# Altium PCB AX301_AX4010.PcbDoc (part 2 of 10)
Units mil, origin at the board's own origin, x right, y up, seen from the top; angles counter-clockwise.
Board outline 5185 x 3614 mil, 4 copper layers (Top Layer, GND, Mid-Layer 1, Bottom Layer); 191 components, 338 nets, 1108 pads, 420 vias.
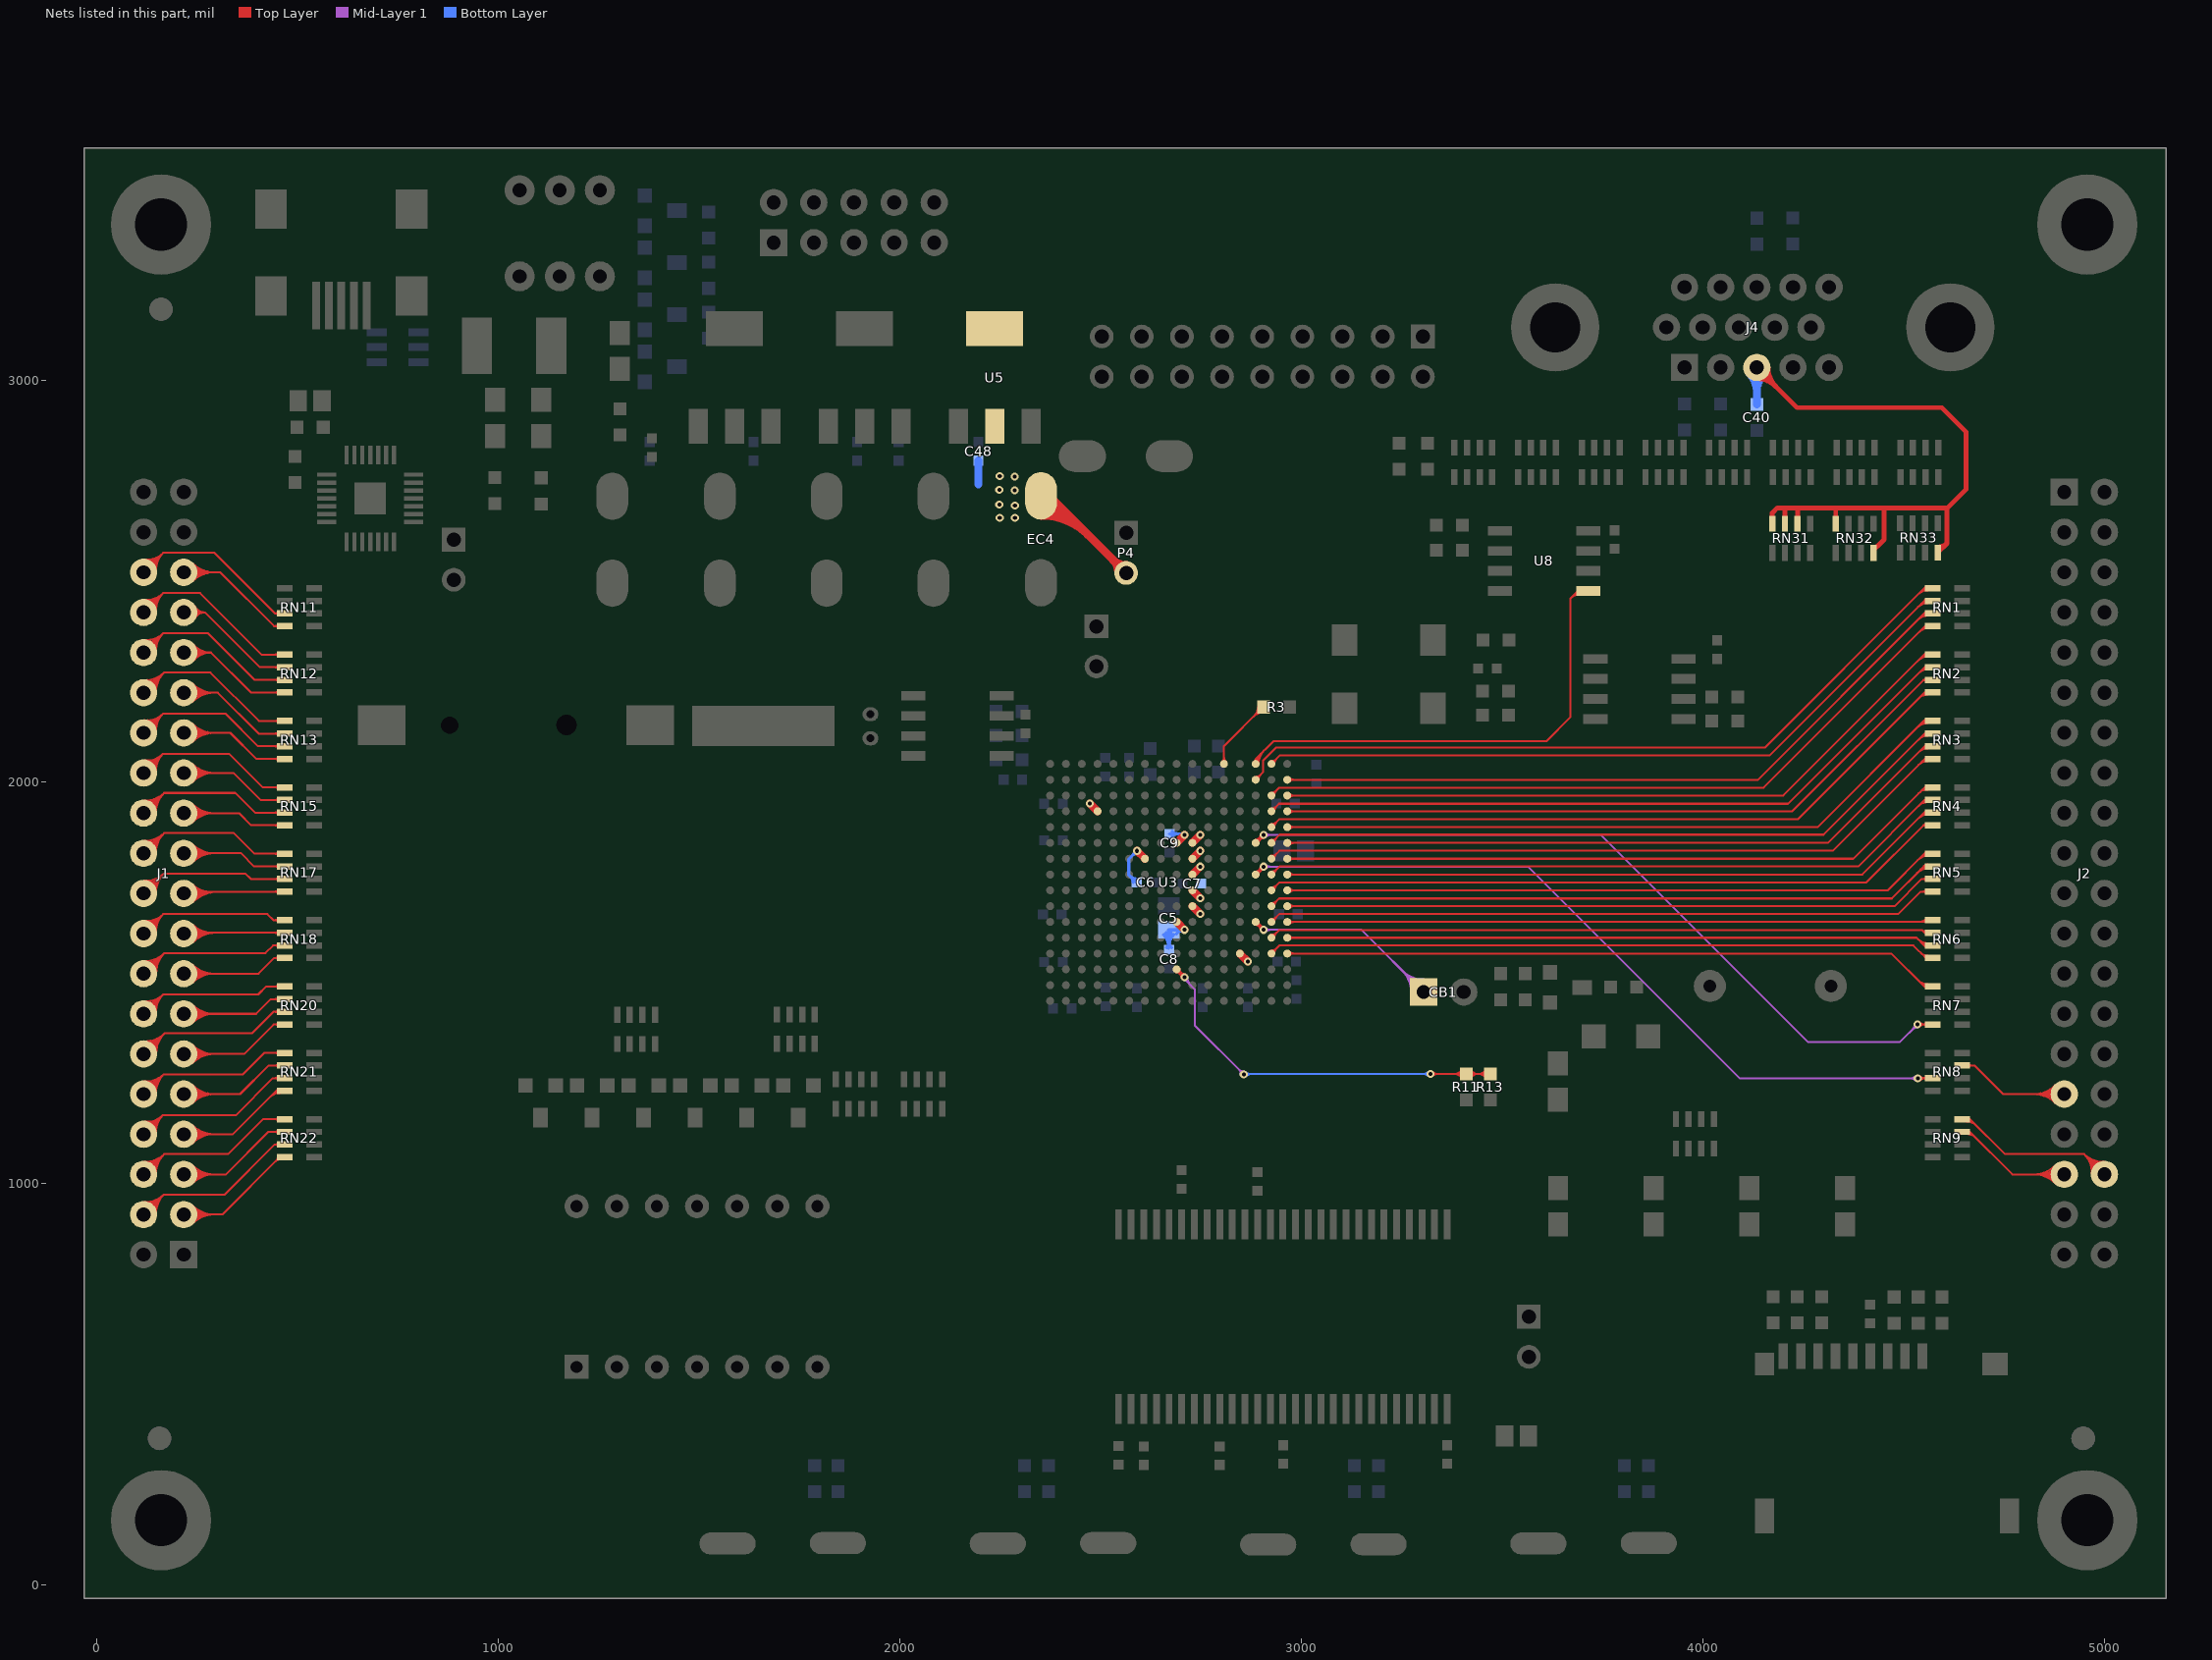
[diagram p4: the nets of this part, all layers, seen from the top]

## Via types
v1: diameter 20, hole 10, Top Layer to Bottom Layer, 377 vias
v2: diameter 30, hole 15, Top Layer to Bottom Layer, 41 vias
v3: diameter 40, hole 20, Top Layer to Bottom Layer, 2 vias

## Nets (pads, with @x,y where several pads share a name; then routed paths per layer and width w, separated by ;. In a path a pad name is that pad's centre, name@x,y a point inside that pad or via, vN(x,y) a via of type N, cw(c..) or ccw(c..) an arc to the next point about the centre after c; other vN are vias at no path point) (continued)
_E8: J2.36 RN9.8 | length 789.6
  Top Layer w5: RN9.8@4646.15,1159 4666,1159 ; RN9.8@4657.96,1153.63 cw(c4657.96,1121.24) 4680.86,1144.14 ; RN9.8@4657.96,1158.63 cw(c4657.96,1138.32) 4672.32,1152.68 ; RN9.8@4662.93,1156.95 cw(c4666,1155.67) 4666,1159 ; RN9.8@4662.93,1161.05 ccw(c4666,1162.33) 4666,1159 ; J2.36@4969.54,1023.15 ccw(c4904.9,1026.24) 4950.66,1072 ; J2.36@4974.53,1022.92 ccw(c4920.15,1025.51) 4958.65,1064.01 ccw(c4997.14,1102.5) J2.36@4999.74,1048.12 ; J2.36@4979.52,1022.68 ccw(c4935.41,1024.78) 4966.64,1056.02 ccw(c4997.87,1087.25) J2.36@4999.98,1043.13 ; J2.36@4984.52,1022.44 ccw(c4950.66,1024.06) 4974.63,1048.02 ccw(c4998.6,1071.99) J2.36@5000.21,1038.13 ; J2.36@4999.5,1053.12 cw(c4996.41,1117.76) 4950.66,1072 ; J2.36@5001,1021.65 4950.65,1072 ; 4666,1159 4753,1072 4950.65,1072
_E9: J2.35 RN9.7 | length 702.2
  Top Layer w5: RN9.7@4646.15,1127.5 4665.5,1127.5 4771.35,1021.65 J2.35@4901,1021.65 ; RN9.7@4657.96,1122.13 cw(c4657.96,1090.96) 4680,1113 ; RN9.7@4657.96,1127.13 cw(c4657.96,1108.04) 4671.46,1121.54 ; J2.35@4878.73,999.38 ccw(c4824.95,945.61) 4824.95,1021.65 ccw(c4824.95,1097.7) J2.35@4878.73,1043.93 ; J2.35@4882.26,1002.92 ccw(c4837.02,957.68) 4837.02,1021.65 ccw(c4837.02,1085.63) J2.35@4882.26,1040.39 ; J2.35@4885.8,1006.45 ccw(c4849.09,969.75) 4849.09,1021.65 ccw(c4849.09,1073.56) J2.35@4885.8,1036.86 ; J2.35@4889.33,1009.99 ccw(c4861.17,981.82) 4861.17,1021.65 ccw(c4861.17,1061.49) J2.35@4889.33,1033.32
_F8: J2.31 RN8.7 | length 668.8
  Top Layer w5: RN8.7@4646.15,1292.88 4677.12,1292.88 4748.35,1221.65 J2.31@4901,1221.65 ; RN8.7@4661.76,1289.08 cw(c4670.94,1279.9) 4670.94,1292.88 cw(c4670.94,1305.85) RN8.7@4661.76,1296.68 ; J2.31@4878.73,1199.38 ccw(c4824.95,1145.61) 4824.95,1221.65 ccw(c4824.95,1297.7) J2.31@4878.73,1243.93 ; J2.31@4882.26,1202.92 ccw(c4837.02,1157.68) 4837.02,1221.65 ccw(c4837.02,1285.63) J2.31@4882.26,1240.39 ; J2.31@4885.8,1206.45 ccw(c4849.09,1169.75) 4849.09,1221.65 ccw(c4849.09,1273.56) J2.31@4885.8,1236.86 ; J2.31@4889.33,1209.99 ccw(c4861.17,1181.82) 4861.17,1221.65 ccw(c4861.17,1261.49) J2.31@4889.33,1233.32
_K9: J1.31 RN12.4 | length 617.4
  Top Layer w5: J1.31@217,2321.65 284.35,2321.65 ; J1.31@228.93,2310.98 cw(c251.96,2291.46) 251.96,2321.65 cw(c251.96,2351.85) J1.31@228.93,2332.32 ; J1.31@232.75,2307.75 cw(c262.76,2282.31) 262.76,2321.65 cw(c262.76,2360.99) J1.31@232.75,2335.56 ; J1.31@236.56,2304.52 cw(c273.55,2273.16) 273.55,2321.65 cw(c273.55,2370.14) J1.31@236.56,2338.79 ; J1.31@240.37,2342.02 ccw(c284.34,2379.29) 284.34,2321.65 ; J1.31@240.38,2301.28 cw(c284.34,2264.01) 284.34,2321.65 ; RN12.4@452.39,2218.34 ccw(c443.21,2209.16) 443.21,2222.14 ccw(c443.21,2235.11) RN12.4@452.39,2225.94 ; RN12.4@468,2222.14 383.86,2222.14 284.35,2321.65
_L9: J1.30 RN13.1 | length 774.2
  Top Layer w5: J1.30@117,2221.65 167.35,2272 ; J1.30@117.23,2238.13 ccw(c119.09,2272.69) 143.56,2248.22 ; J1.30@117.5,2243.12 ccw(c119.9,2287.74) 151.49,2256.14 ; J1.30@117.77,2248.11 ccw(c120.71,2302.78) 159.42,2264.07 ; J1.30@118.04,2253.11 ccw(c121.51,2317.83) 167.34,2272 ; J1.30@132.84,2222.18 cw(c167.08,2223.28) 142.86,2247.51 ; J1.30@137.84,2222.34 cw(c182.9,2223.79) 151.02,2255.67 ; J1.30@142.83,2222.5 cw(c198.72,2224.3) 159.18,2263.84 ; J1.30@147.83,2222.66 cw(c214.54,2224.8) 167.34,2272 ; RN13.1@452.39,2147.45 ccw(c443.21,2138.28) 443.21,2151.25 ccw(c443.21,2164.22) RN13.1@452.39,2155.05 ; RN13.1@468,2151.25 403.75,2151.25 283,2272 167.35,2272
_L10: J1.29 RN13.2 | length 677.6
  Top Layer w5: J1.29@217,2221.65 301.35,2221.65 403.25,2119.75 RN13.2@468,2119.75 ; J1.29@228.01,2209.99 cw(c256.18,2181.82) 256.18,2221.65 cw(c256.18,2261.49) J1.29@228.01,2233.32 ; J1.29@231.55,2206.45 cw(c268.25,2169.75) 268.25,2221.65 cw(c268.25,2273.56) J1.29@231.55,2236.86 ; J1.29@235.08,2202.91 cw(c280.32,2157.68) 280.32,2221.65 cw(c280.32,2285.63) J1.29@235.08,2240.39 ; J1.29@238.62,2199.38 cw(c292.4,2145.6) 292.4,2221.65 cw(c292.39,2297.7) J1.29@238.62,2243.93 ; RN13.2@452.39,2115.95 ccw(c443.21,2106.78) 443.21,2119.75 ccw(c443.21,2132.73) RN13.2@452.39,2123.55
_M9: J1.28 RN13.3 | length 736.3
  Top Layer w5: J1.28@117,2121.65 165.35,2170 ; J1.28@117.73,2138.09 ccw(c120.36,2169.3) 142.5,2147.16 ; J1.28@118.15,2143.08 ccw(c121.54,2183.34) 150.12,2154.77 ; J1.28@118.57,2148.06 ccw(c122.73,2197.39) 157.73,2162.38 ; J1.28@118.99,2153.04 ccw(c123.91,2211.43) 165.34,2170 ; J1.28@132.81,2122.67 cw(c163.71,2124.59) 141.82,2146.48 ; J1.28@137.81,2122.98 cw(c178.48,2125.5) 149.66,2154.32 ; J1.28@142.8,2123.29 cw(c193.25,2126.42) 157.5,2162.16 ; J1.28@147.79,2123.6 cw(c208.01,2127.33) 165.34,2170 ; RN13.3@452.39,2084.46 ccw(c443.21,2075.28) 443.21,2088.26 ccw(c443.21,2101.23) RN13.3@452.39,2092.06 ; RN13.3@468,2088.26 401.74,2088.26 320,2170 165.35,2170
_N2: J1.36 RN11.3 | length 763.1
  Top Layer w5: J1.36@117,2521.65 165.35,2570 ; J1.36@117.73,2538.09 ccw(c120.36,2569.3) 142.5,2547.16 ; J1.36@118.15,2543.08 ccw(c121.54,2583.34) 150.12,2554.77 ; J1.36@118.57,2548.06 ccw(c122.73,2597.39) 157.73,2562.38 ; J1.36@118.99,2553.04 ccw(c123.91,2611.43) 165.34,2570 ; J1.36@132.81,2522.67 cw(c163.71,2524.59) 141.82,2546.48 ; J1.36@137.81,2522.98 cw(c178.48,2525.5) 149.66,2554.32 ; J1.36@142.8,2523.29 cw(c193.25,2526.42) 157.5,2562.16 ; J1.36@147.79,2523.6 cw(c208.01,2527.33) 165.34,2570 ; RN11.3@452.22,2415.38 ccw(c443.99,2407.86) 443.99,2419.01 ; RN11.3@452.22,2422.63 cw(c443.99,2430.16) 443.99,2419.01 ; RN11.3@468,2419.01 443.99,2419.01 ; 165.35,2570 293,2570 443.99,2419.01
_P1: J1.35 RN11.4 | length 691
  Top Layer w5: J1.35@217,2521.65 307.35,2521.65 441.49,2387.51 RN11.4@468,2387.51 ; J1.35@228.01,2509.99 cw(c256.18,2481.82) 256.18,2521.65 cw(c256.18,2561.49) J1.35@228.01,2533.32 ; J1.35@231.55,2506.45 cw(c268.25,2469.75) 268.25,2521.65 cw(c268.25,2573.56) J1.35@231.55,2536.86 ; J1.35@235.08,2502.91 cw(c280.32,2457.68) 280.32,2521.65 cw(c280.32,2585.63) J1.35@235.08,2540.39 ; J1.35@238.62,2499.38 cw(c292.4,2445.6) 292.4,2521.65 cw(c292.39,2597.7) J1.35@238.62,2543.93 ; RN11.4@452.39,2383.71 ccw(c443.21,2374.54) 443.21,2387.51 ccw(c443.21,2400.49) RN11.4@452.39,2391.31
_P2: J1.34 RN12.1 | length 766
  Top Layer w5: J1.34@117,2421.65 165.35,2470 ; J1.34@117.73,2438.09 ccw(c120.36,2469.3) 142.5,2447.16 ; J1.34@118.15,2443.08 ccw(c121.54,2483.34) 150.12,2454.77 ; J1.34@118.57,2448.06 ccw(c122.73,2497.39) 157.73,2462.38 ; J1.34@118.99,2453.04 ccw(c123.91,2511.43) 165.34,2470 ; J1.34@132.81,2422.67 cw(c163.71,2424.59) 141.82,2446.48 ; J1.34@137.81,2422.98 cw(c178.48,2425.5) 149.66,2454.32 ; J1.34@142.8,2423.29 cw(c193.25,2426.42) 157.5,2462.16 ; J1.34@147.79,2423.6 cw(c208.01,2427.33) 165.34,2470 ; RN12.1@452.39,2312.83 ccw(c443.21,2303.65) 443.21,2316.62 ccw(c443.21,2329.6) RN12.1@452.39,2320.42 ; RN12.1@468,2316.62 410.38,2316.62 257,2470 165.35,2470
_P3: J1.26 RN15.1 | length 725.9
  Top Layer w5: J1.26@117,2021.65 164.35,2069 ; J1.26@117.99,2038.07 ccw(c120.96,2067.64) 141.97,2046.63 ; J1.26@118.49,2043.05 ccw(c122.32,2081.19) 149.43,2054.08 ; J1.26@118.99,2048.02 ccw(c123.68,2094.75) 156.89,2061.54 ; J1.26@119.49,2053 ccw(c125.04,2108.3) 164.34,2069 ; J1.26@132.8,2022.93 cw(c162.06,2025.2) 141.31,2045.96 ; J1.26@137.78,2023.32 cw(c176.31,2026.31) 148.99,2053.64 ; J1.26@142.77,2023.71 cw(c190.56,2027.42) 156.66,2061.32 ; J1.26@147.75,2024.09 cw(c204.82,2028.53) 164.34,2069 ; RN15.1@452.39,1982.08 ccw(c443.21,1972.9) 443.21,1985.88 ccw(c443.21,1998.85) RN15.1@452.39,1989.67 ; RN15.1@468,1985.88 413.12,1985.88 330,2069 164.35,2069
_P8: J1.32 RN12.3 | length 750.7
  Top Layer w5: J1.32@117,2321.65 165.35,2370 ; J1.32@117.73,2338.09 ccw(c120.36,2369.3) 142.5,2347.16 ; J1.32@118.15,2343.08 ccw(c121.54,2383.34) 150.12,2354.77 ; J1.32@118.57,2348.06 ccw(c122.73,2397.39) 157.73,2362.38 ; J1.32@118.99,2353.04 ccw(c123.91,2411.43) 165.34,2370 ; J1.32@132.81,2322.67 cw(c163.71,2324.59) 141.82,2346.48 ; J1.32@137.81,2322.98 cw(c178.48,2325.5) 149.66,2354.32 ; J1.32@142.8,2323.29 cw(c193.25,2326.42) 157.5,2362.16 ; J1.32@147.79,2323.6 cw(c208.01,2327.33) 165.34,2370 ; RN12.3@452.39,2249.83 ccw(c443.21,2240.66) 443.21,2253.63 ccw(c443.21,2266.61) RN12.3@452.39,2257.43 ; RN12.3@468,2253.63 393.37,2253.63 277,2370 165.35,2370
_R1: J1.33 RN12.2 | length 484
  Top Layer w5: J1.33@217,2421.65 269.35,2421.65 ; J1.33@235.23,2411.38 cw(c252.52,2401.97) 252.52,2421.65 cw(c252.52,2441.33) J1.33@235.23,2431.93 ; J1.33@239.62,2408.99 cw(c260.93,2397.4) 260.93,2421.65 cw(c260.93,2445.91) J1.33@239.62,2434.32 ; J1.33@244.02,2406.6 cw(c269.34,2392.82) 269.34,2421.65 ; J1.33@244.02,2436.71 ccw(c269.34,2450.49) 269.34,2421.65 ; RN12.2@452.39,2281.33 ccw(c443.21,2272.15) 443.21,2285.13 ccw(c443.21,2298.1) RN12.2@452.39,2288.93 ; RN12.2@468,2285.13 405.87,2285.13 269.35,2421.65
_R3: J1.24 RN15.3 | length 744.6
  Top Layer w5: J1.24@117,1921.65 167.35,1972 ; J1.24@117.23,1938.13 ccw(c119.09,1972.69) 143.56,1948.22 ; J1.24@117.5,1943.12 ccw(c119.9,1987.74) 151.49,1956.14 ; J1.24@117.77,1948.11 ccw(c120.71,2002.78) 159.42,1964.07 ; J1.24@118.04,1953.11 ccw(c121.51,2017.83) 167.34,1972 ; J1.24@132.84,1922.18 cw(c167.08,1923.28) 142.86,1947.51 ; J1.24@137.84,1922.34 cw(c182.9,1923.79) 151.02,1955.67 ; J1.24@142.83,1922.5 cw(c198.72,1924.3) 159.18,1963.84 ; J1.24@147.83,1922.66 cw(c214.54,1924.8) 167.34,1972 ; RN15.3@452.39,1919.08 ccw(c443.21,1909.91) 443.21,1922.88 ccw(c443.21,1935.86) RN15.3@452.39,1926.68 ; RN15.3@468,1922.88 394.12,1922.88 345,1972 167.35,1972
_R4: J1.22 RN17.1 | length 745.6
  Top Layer w5: J1.22@117,1821.65 167.35,1872 ; J1.22@117.23,1838.13 ccw(c119.09,1872.69) 143.56,1848.22 ; J1.22@117.5,1843.12 ccw(c119.9,1887.74) 151.49,1856.14 ; J1.22@117.77,1848.11 ccw(c120.71,1902.78) 159.42,1864.07 ; J1.22@118.04,1853.11 ccw(c121.51,1917.83) 167.34,1872 ; J1.22@132.84,1822.18 cw(c167.08,1823.28) 142.86,1847.51 ; J1.22@137.84,1822.34 cw(c182.9,1823.79) 151.02,1855.67 ; J1.22@142.83,1822.5 cw(c198.72,1824.3) 159.18,1863.84 ; J1.22@147.83,1822.66 cw(c214.54,1824.8) 167.34,1872 ; RN17.1@452.39,1816.7 ccw(c443.21,1807.53) 443.21,1820.5 ccw(c443.21,1833.47) RN17.1@452.39,1824.3 ; RN17.1@468,1820.5 392.5,1820.5 341,1872 167.35,1872
_R5: J1.20 RN17.3 | length 719
  Top Layer w5: J1.20@117,1721.65 166.35,1771 ; J1.20@117.48,1738.11 ccw(c119.74,1770.98) 143.03,1747.69 ; J1.20@117.82,1743.1 ccw(c120.74,1785.52) 150.8,1755.46 ; J1.20@118.16,1748.09 ccw(c121.73,1800.07) 158.57,1763.23 ; J1.20@118.51,1753.08 ccw(c122.73,1814.61) 166.34,1771 ; J1.20@132.83,1722.42 cw(c165.39,1723.95) 142.34,1746.99 ; J1.20@137.82,1722.66 cw(c180.67,1724.66) 150.34,1754.99 ; J1.20@142.82,1722.89 cw(c195.96,1725.38) 158.34,1763 ; J1.20@147.81,1723.12 cw(c211.25,1726.09) 166.34,1771 ; RN17.3@452.39,1753.71 ccw(c443.21,1744.53) 443.21,1757.51 ccw(c443.21,1770.48) RN17.3@452.39,1761.31 ; RN17.3@468,1757.51 383.49,1757.51 370,1771 166.35,1771
_R6: J1.18 RN18.1 | length 708.6
  Top Layer w5: J1.18@117,1621.65 165.35,1670 ; J1.18@117.73,1638.09 ccw(c120.36,1669.3) 142.5,1647.16 ; J1.18@118.15,1643.08 ccw(c121.54,1683.34) 150.12,1654.77 ; J1.18@118.57,1648.06 ccw(c122.73,1697.39) 157.73,1662.38 ; J1.18@118.99,1653.04 ccw(c123.91,1711.43) 165.34,1670 ; J1.18@132.81,1622.67 cw(c163.71,1624.59) 141.82,1646.48 ; J1.18@137.81,1622.98 cw(c178.48,1625.5) 149.66,1654.32 ; J1.18@142.8,1623.29 cw(c193.25,1626.42) 157.5,1662.16 ; J1.18@147.79,1623.6 cw(c208.01,1627.33) 165.34,1670 ; RN18.1@452.39,1651.33 ccw(c443.21,1642.15) 443.21,1655.12 ccw(c443.21,1668.1) RN18.1@452.39,1658.92 ; RN18.1@468,1655.12 439.88,1655.12 425,1670 165.35,1670
_R7: J1.16 RN18.3 | length 742.9
  Top Layer w5: J1.16@117,1521.65 168.35,1573 ; J1.16@116.99,1538.14 ccw(c118.42,1574.42) 144.09,1548.75 ; J1.16@117.19,1543.14 ccw(c119.03,1589.98) 152.18,1556.83 ; J1.16@117.39,1548.13 ccw(c119.64,1605.54) 160.26,1564.91 ; J1.16@117.58,1553.13 ccw(c120.25,1621.09) 168.34,1573 ; J1.16@132.84,1521.95 cw(c168.81,1522.59) 143.37,1548.03 ; J1.16@137.84,1522.04 cw(c185.16,1522.89) 151.7,1556.35 ; J1.16@142.84,1522.13 cw(c201.51,1523.18) 160.02,1564.67 ; J1.16@147.84,1522.22 cw(c217.87,1523.47) 168.34,1573 ; RN18.3@452.39,1588.33 ccw(c443.21,1579.16) 443.21,1592.13 ccw(c443.21,1605.11) RN18.3@452.39,1595.93 ; RN18.3@468,1592.13 439.13,1592.13 420,1573 168.35,1573
_R8: J1.14 RN20.1 | length 710.6
  Top Layer w5: J1.14@117,1421.65 165.35,1470 ; J1.14@117.73,1438.09 ccw(c120.36,1469.3) 142.5,1447.16 ; J1.14@118.15,1443.08 ccw(c121.54,1483.34) 150.12,1454.77 ; J1.14@118.57,1448.06 ccw(c122.73,1497.39) 157.73,1462.38 ; J1.14@118.99,1453.04 ccw(c123.91,1511.43) 165.34,1470 ; J1.14@132.81,1422.67 cw(c163.71,1424.59) 141.82,1446.48 ; J1.14@137.81,1422.98 cw(c178.48,1425.5) 149.66,1454.32 ; J1.14@142.8,1423.29 cw(c193.25,1426.42) 157.5,1462.16 ; J1.14@147.79,1423.6 cw(c208.01,1427.33) 165.34,1470 ; RN20.1@452.39,1485.95 ccw(c443.21,1476.78) 443.21,1489.75 ccw(c443.21,1502.72) RN20.1@452.39,1493.55 ; RN20.1@468,1489.75 421.75,1489.75 402,1470 165.35,1470
_R9: J1.12 RN20.3 | length 757.3
  Top Layer w5: J1.12@117,1321.65 168.35,1373 ; J1.12@116.99,1338.14 ccw(c118.42,1374.42) 144.09,1348.75 ; J1.12@117.19,1343.14 ccw(c119.03,1389.98) 152.18,1356.83 ; J1.12@117.39,1348.13 ccw(c119.64,1405.54) 160.26,1364.91 ; J1.12@117.58,1353.13 ccw(c120.25,1421.09) 168.34,1373 ; J1.12@132.84,1321.95 cw(c168.81,1322.59) 143.37,1348.03 ; J1.12@137.84,1322.04 cw(c185.16,1322.89) 151.7,1356.35 ; J1.12@142.84,1322.13 cw(c201.51,1323.18) 160.02,1364.67 ; J1.12@147.84,1322.22 cw(c217.87,1323.47) 168.34,1373 ; RN20.3@452.39,1422.96 ccw(c443.21,1413.78) 443.21,1426.76 ccw(c443.21,1439.73) RN20.3@452.39,1430.56 ; RN20.3@468,1426.76 439.76,1426.76 386,1373 168.35,1373
_R10: J1.10 RN21.1 | length 735.5
  Top Layer w5: J1.10@117,1221.65 166.35,1271 ; J1.10@117.48,1238.11 ccw(c119.74,1270.98) 143.03,1247.69 ; J1.10@117.82,1243.1 ccw(c120.74,1285.52) 150.8,1255.46 ; J1.10@118.16,1248.09 ccw(c121.73,1300.07) 158.57,1263.23 ; J1.10@118.51,1253.08 ccw(c122.73,1314.61) 166.34,1271 ; J1.10@132.83,1222.42 cw(c165.39,1223.95) 142.34,1246.99 ; J1.10@137.82,1222.66 cw(c180.67,1224.66) 150.34,1254.99 ; J1.10@142.82,1222.89 cw(c195.96,1225.38) 158.34,1263 ; J1.10@147.81,1223.12 cw(c211.25,1226.09) 166.34,1271 ; RN21.1@452.39,1320.58 ccw(c443.21,1311.4) 443.21,1324.38 ccw(c443.21,1337.35) RN21.1@452.39,1328.17 ; RN21.1@468,1324.38 417.38,1324.38 364,1271 166.35,1271
_R11: J1.8 RN21.3 | length 729.7
  Top Layer w5: J1.8@117,1121.65 164.35,1169 ; J1.8@117.99,1138.07 ccw(c120.96,1167.64) 141.97,1146.63 ; J1.8@118.49,1143.05 ccw(c122.32,1181.19) 149.43,1154.08 ; J1.8@118.99,1148.02 ccw(c123.68,1194.75) 156.89,1161.54 ; J1.8@119.49,1153 ccw(c125.04,1208.3) 164.34,1169 ; J1.8@132.8,1122.93 cw(c162.06,1125.2) 141.31,1145.96 ; J1.8@137.78,1123.32 cw(c176.31,1126.31) 148.99,1153.64 ; J1.8@142.77,1123.71 cw(c190.56,1127.42) 156.66,1161.32 ; J1.8@147.75,1124.09 cw(c204.82,1128.53) 164.34,1169 ; RN21.3@452.39,1257.58 ccw(c443.21,1248.41) 443.21,1261.38 ccw(c443.21,1274.36) RN21.3@452.39,1265.18 ; RN21.3@468,1261.38 438.38,1261.38 346,1169 164.35,1169
_R12: J1.6 RN22.1 | length 760.3
  Top Layer w5: J1.6@117,1021.65 167.35,1072 ; J1.6@117.23,1038.13 ccw(c119.09,1072.69) 143.56,1048.22 ; J1.6@117.5,1043.12 ccw(c119.9,1087.74) 151.49,1056.14 ; J1.6@117.77,1048.11 ccw(c120.71,1102.78) 159.42,1064.07 ; J1.6@118.04,1053.11 ccw(c121.51,1117.83) 167.34,1072 ; J1.6@132.84,1022.18 cw(c167.08,1023.28) 142.86,1047.51 ; J1.6@137.84,1022.34 cw(c182.9,1023.79) 151.02,1055.67 ; J1.6@142.83,1022.5 cw(c198.72,1024.3) 159.18,1063.84 ; J1.6@147.83,1022.66 cw(c214.54,1024.8) 167.34,1072 ; RN22.1@452.39,1155.2 ccw(c443.21,1146.03) 443.21,1159 ccw(c443.21,1171.97) RN22.1@452.39,1162.8 ; RN22.1@468,1159 414,1159 327,1072 167.35,1072
_R13: J1.4 RN22.3 | length 765.1
  Top Layer w5: J1.4@117,921.65 166.35,971 ; J1.4@117.48,938.11 ccw(c119.74,970.98) 143.03,947.69 ; J1.4@117.82,943.1 ccw(c120.74,985.52) 150.8,955.46 ; J1.4@118.16,948.09 ccw(c121.73,1000.07) 158.57,963.23 ; J1.4@118.51,953.08 ccw(c122.73,1014.61) 166.34,971 ; J1.4@132.83,922.42 cw(c165.39,923.95) 142.34,946.99 ; J1.4@137.82,922.66 cw(c180.67,924.66) 150.34,954.99 ; J1.4@142.82,922.89 cw(c195.96,925.38) 158.34,963 ; J1.4@147.81,923.12 cw(c211.25,926.09) 166.34,971 ; RN22.3@452.39,1092.21 ccw(c443.21,1083.03) 443.21,1096.01 ccw(c443.21,1108.98) RN22.3@452.39,1099.81 ; RN22.3@468,1096.01 443.01,1096.01 318,971 166.35,971
_T2: J1.27 RN13.4 | length 662.3
  Top Layer w5: J1.27@217,2121.65 332.35,2121.65 397.24,2056.76 RN13.4@468,2056.76 ; J1.27@228.01,2109.99 cw(c256.18,2081.82) 256.18,2121.65 cw(c256.18,2161.49) J1.27@228.01,2133.32 ; J1.27@231.55,2106.45 cw(c268.25,2069.75) 268.25,2121.65 cw(c268.25,2173.56) J1.27@231.55,2136.86 ; J1.27@235.08,2102.91 cw(c280.32,2057.68) 280.32,2121.65 cw(c280.32,2185.63) J1.27@235.08,2140.39 ; J1.27@238.62,2099.38 cw(c292.4,2045.6) 292.4,2121.65 cw(c292.39,2197.7) J1.27@238.62,2143.93 ; RN13.4@452.39,2052.96 ccw(c443.21,2043.79) 443.21,2056.76 ccw(c443.21,2069.74) RN13.4@452.39,2060.56
_T3: J1.25 RN15.2 | length 663.3
  Top Layer w5: J1.25@217,2021.65 340.35,2021.65 407.62,1954.38 RN15.2@468,1954.38 ; J1.25@228.01,2009.99 cw(c256.18,1981.82) 256.18,2021.65 cw(c256.18,2061.49) J1.25@228.01,2033.32 ; J1.25@231.55,2006.45 cw(c268.25,1969.75) 268.25,2021.65 cw(c268.25,2073.56) J1.25@231.55,2036.86 ; J1.25@235.08,2002.91 cw(c280.32,1957.68) 280.32,2021.65 cw(c280.32,2085.63) J1.25@235.08,2040.39 ; J1.25@238.62,1999.38 cw(c292.4,1945.6) 292.4,2021.65 cw(c292.39,2097.7) J1.25@238.62,2043.93 ; RN15.2@452.39,1950.58 ccw(c443.21,1941.4) 443.21,1954.38 ccw(c443.21,1967.35) RN15.2@452.39,1958.18
_T4: J1.23 RN15.4 | length 648
  Top Layer w5: J1.23@217,1921.65 354.35,1921.65 384.61,1891.39 RN15.4@468,1891.39 ; J1.23@228.01,1909.99 cw(c256.18,1881.82) 256.18,1921.65 cw(c256.18,1961.49) J1.23@228.01,1933.32 ; J1.23@231.55,1906.45 cw(c268.25,1869.75) 268.25,1921.65 cw(c268.25,1973.56) J1.23@231.55,1936.86 ; J1.23@235.08,1902.91 cw(c280.32,1857.68) 280.32,1921.65 cw(c280.32,1985.63) J1.23@235.08,1940.39 ; J1.23@238.62,1899.38 cw(c292.4,1845.6) 292.4,1921.65 cw(c292.39,1997.7) J1.23@238.62,1943.93 ; RN15.4@452.39,1887.59 ccw(c443.21,1878.41) 443.21,1891.39 ccw(c443.21,1904.36) RN15.4@452.39,1895.19
_T5: J1.21 RN17.2 | length 649
  Top Layer w5: J1.21@217,1821.65 359.35,1821.65 392,1789 RN17.2@468,1789 ; J1.21@228.01,1809.99 cw(c256.18,1781.82) 256.18,1821.65 cw(c256.18,1861.49) J1.21@228.01,1833.32 ; J1.21@231.55,1806.45 cw(c268.25,1769.75) 268.25,1821.65 cw(c268.25,1873.56) J1.21@231.55,1836.86 ; J1.21@235.08,1802.91 cw(c280.32,1757.68) 280.32,1821.65 cw(c280.32,1885.63) J1.21@235.08,1840.39 ; J1.21@238.62,1799.38 cw(c292.4,1745.6) 292.4,1821.65 cw(c292.39,1897.7) J1.21@238.62,1843.93 ; RN17.2@452.39,1785.2 ccw(c443.21,1776.03) 443.21,1789 ccw(c443.21,1801.98) RN17.2@452.39,1792.8
_T6: J1.19 RN17.4 | length 651.1
  Top Layer w5: J1.19@217,1721.65 221.36,1726.01 RN17.4@468,1726.01 ; J1.19@224.48,1713.52 cw(c254.63,1683.37) 254.63,1726.01 ; J1.19@228.01,1709.99 cw(c266.7,1671.3) 266.7,1726.01 ; J1.19@231.55,1706.45 cw(c278.77,1659.22) 278.77,1726.01 ; J1.19@231.55,1736.86 ccw(c257.73,1763.04) 257.73,1726.01 ; J1.19@235.08,1702.91 cw(c290.85,1647.15) 290.85,1726.01 ; J1.19@235.08,1740.39 ccw(c269.8,1775.11) 269.8,1726.01 ; J1.19@238.62,1699.38 cw(c302.92,1635.08) 302.92,1726.01 ; J1.19@238.62,1743.93 ccw(c281.87,1787.18) 281.87,1726.01 ; RN17.4@452.39,1722.21 ccw(c443.21,1713.04) 443.21,1726.01 ccw(c443.21,1738.99) RN17.4@452.39,1729.81
_T7: J1.17 RN18.2 | length 636.3
  Top Layer w5: J1.17@217,1621.65 218.98,1623.63 RN18.2@468,1623.63 ; J1.17@228.01,1609.99 cw(c260.95,1577.05) 260.95,1623.63 ; J1.17@228.01,1633.32 ccw(c251.41,1656.72) 251.41,1623.63 ; J1.17@231.55,1606.45 cw(c273.02,1564.98) 273.02,1623.63 ; J1.17@231.55,1636.86 ccw(c263.48,1668.79) 263.48,1623.63 ; J1.17@235.08,1602.91 cw(c285.09,1552.91) 285.09,1623.63 ; J1.17@235.08,1640.39 ccw(c275.55,1680.86) 275.55,1623.63 ; J1.17@238.62,1599.38 cw(c297.16,1540.84) 297.16,1623.63 ; J1.17@238.62,1643.93 ccw(c287.62,1692.93) 287.62,1623.63 ; RN18.2@452.39,1619.83 ccw(c443.21,1610.65) 443.21,1623.63 ccw(c443.21,1636.6) RN18.2@452.39,1627.43
_T8: J1.15 RN18.4 | length 651.6
  Top Layer w5: J1.15@217,1521.65 402.65,1521.65 441.64,1560.64 RN18.4@468,1560.64 ; J1.15@228.01,1509.99 cw(c256.18,1481.82) 256.18,1521.65 cw(c256.18,1561.49) J1.15@228.01,1533.32 ; J1.15@231.55,1506.45 cw(c268.25,1469.75) 268.25,1521.65 cw(c268.25,1573.56) J1.15@231.55,1536.86 ; J1.15@235.08,1502.91 cw(c280.32,1457.68) 280.32,1521.65 cw(c280.32,1585.63) J1.15@235.08,1540.39 ; J1.15@238.62,1499.38 cw(c292.4,1445.6) 292.4,1521.65 cw(c292.39,1597.7) J1.15@238.62,1543.93 ; RN18.4@452.39,1556.84 ccw(c443.21,1547.66) 443.21,1560.64 ccw(c443.21,1573.61) RN18.4@452.39,1564.44
_T9: J1.13 RN20.2 | length 650.6
  Top Layer w5: J1.13@217,1421.65 396.65,1421.65 433.25,1458.25 RN20.2@468,1458.25 ; J1.13@228.01,1409.99 cw(c256.18,1381.82) 256.18,1421.65 cw(c256.18,1461.49) J1.13@228.01,1433.32 ; J1.13@231.55,1406.45 cw(c268.25,1369.75) 268.25,1421.65 cw(c268.25,1473.56) J1.13@231.55,1436.86 ; J1.13@235.08,1402.91 cw(c280.32,1357.68) 280.32,1421.65 cw(c280.32,1485.63) J1.13@235.08,1440.39 ; J1.13@238.62,1399.38 cw(c292.4,1345.6) 292.4,1421.65 cw(c292.39,1497.7) J1.13@238.62,1443.93 ; RN20.2@452.39,1454.45 ccw(c443.21,1445.28) 443.21,1458.25 ccw(c443.21,1471.23) RN20.2@452.39,1462.05
_T10: J1.11 RN20.4 | length 665.9
  Top Layer w5: J1.11@217,1321.65 366.65,1321.65 440.26,1395.26 RN20.4@468,1395.26 ; J1.11@228.01,1309.99 cw(c256.18,1281.82) 256.18,1321.65 cw(c256.18,1361.49) J1.11@228.01,1333.32 ; J1.11@231.55,1306.45 cw(c268.25,1269.75) 268.25,1321.65 cw(c268.25,1373.56) J1.11@231.55,1336.86 ; J1.11@235.08,1302.91 cw(c280.32,1257.68) 280.32,1321.65 cw(c280.32,1385.63) J1.11@235.08,1340.39 ; J1.11@238.62,1299.38 cw(c292.4,1245.6) 292.4,1321.65 cw(c292.39,1397.7) J1.11@238.62,1343.93 ; RN20.4@452.39,1391.46 ccw(c443.21,1382.29) 443.21,1395.26 ccw(c443.21,1408.24) RN20.4@452.39,1399.06
_T11: J1.9 RN21.2 | length 664.9
  Top Layer w5: J1.9@217,1221.65 356.65,1221.65 427.88,1292.88 RN21.2@468,1292.88 ; J1.9@228.01,1209.99 cw(c256.18,1181.82) 256.18,1221.65 cw(c256.18,1261.49) J1.9@228.01,1233.32 ; J1.9@231.55,1206.45 cw(c268.25,1169.75) 268.25,1221.65 cw(c268.25,1273.56) J1.9@231.55,1236.86 ; J1.9@235.08,1202.91 cw(c280.32,1157.68) 280.32,1221.65 cw(c280.32,1285.63) J1.9@235.08,1240.39 ; J1.9@238.62,1199.38 cw(c292.4,1145.6) 292.4,1221.65 cw(c292.39,1297.7) J1.9@238.62,1243.93 ; RN21.2@452.39,1289.08 ccw(c443.21,1279.9) 443.21,1292.88 ccw(c443.21,1305.85) RN21.2@452.39,1296.68
_T12: J1.7 RN21.4 | length 726.2
  Top Layer w5: J1.7@217,1121.65 338.65,1121.65 446.89,1229.89 ; J1.7@228.01,1109.99 cw(c256.18,1081.82) 256.18,1121.65 cw(c256.18,1161.49) J1.7@228.01,1133.32 ; J1.7@231.55,1106.45 cw(c268.25,1069.75) 268.25,1121.65 cw(c268.25,1173.56) J1.7@231.55,1136.86 ; J1.7@235.08,1102.91 cw(c280.32,1057.68) 280.32,1121.65 cw(c280.32,1185.63) J1.7@235.08,1140.39 ; J1.7@238.62,1099.38 cw(c292.4,1045.6) 292.4,1121.65 cw(c292.39,1197.7) J1.7@238.62,1143.93 ; 431.14,1214.13 cw(c456.19,1189.08) RN21.4@456.19,1224.51 ; 439.67,1222.67 cw(c456.19,1206.15) RN21.4@456.19,1229.51 ; 448.21,1231.21 cw(c456.19,1223.22) RN21.4@456.19,1234.51 ; RN21.4@451.53,1227.2 ccw(c446.89,1224.52) 446.89,1229.89 ; RN21.4@451.53,1232.57 cw(c446.89,1235.25) 446.89,1229.89 ; RN21.4@468,1229.89 446.89,1229.89
_T13: J1.5 RN22.2 | length 679.3
  Top Layer w5: J1.5@217,1021.65 321.65,1021.65 427.5,1127.5 RN22.2@468,1127.5 ; J1.5@228.01,1009.99 cw(c256.18,981.82) 256.18,1021.65 cw(c256.18,1061.49) J1.5@228.01,1033.32 ; J1.5@231.55,1006.45 cw(c268.25,969.75) 268.25,1021.65 cw(c268.25,1073.56) J1.5@231.55,1036.86 ; J1.5@235.08,1002.91 cw(c280.32,957.68) 280.32,1021.65 cw(c280.32,1085.63) J1.5@235.08,1040.39 ; J1.5@238.62,999.38 cw(c292.4,945.6) 292.4,1021.65 cw(c292.39,1097.7) J1.5@238.62,1043.93 ; RN22.2@452.39,1123.7 ccw(c443.21,1114.53) 443.21,1127.5 ccw(c443.21,1140.48) RN22.2@452.39,1131.3
_T14: J1.3 RN22.4 | length 694.6
  Top Layer w5: J1.3@217,921.65 312.65,921.65 455.51,1064.51 RN22.4@468,1064.51 ; J1.3@228.01,909.99 cw(c256.18,881.82) 256.18,921.65 cw(c256.18,961.49) J1.3@228.01,933.32 ; J1.3@231.55,906.45 cw(c268.25,869.75) 268.25,921.65 cw(c268.25,973.56) J1.3@231.55,936.86 ; J1.3@235.08,902.91 cw(c280.32,857.68) 280.32,921.65 cw(c280.32,985.63) J1.3@235.08,940.39 ; J1.3@238.62,899.38 cw(c292.4,845.6) 292.4,921.65 cw(c292.39,997.7) J1.3@238.62,943.93 ; 445.86,1054.86 cw(c456.19,1044.53) RN22.4@456.19,1059.14 ; 447.49,1056.49 ccw(c439.48,1064.51) RN22.4@450.82,1064.51
A2: RN1.3 U3.A2 | length 1872.4
  Top Layer w5: U3.A2@2965.28,2004.91 4137.9,2004.91 4552,2419.01 ; U3.A2@2970.47,1999.71 cw(c2983,1987.18) 2983,2004.91 cw(c2983,2022.63) U3.A2@2970.47,2010.1 ; 4536.33,2403.34 cw(c4561.19,2378.48) RN1.3@4561.19,2413.63 ; 4544.86,2411.87 cw(c4561.19,2395.55) RN1.3@4561.19,2418.63 ; RN1.3@4553.4,2420.41 cw(c4561.19,2412.62) RN1.3@4561.19,2423.63 ; RN1.3@4556.51,2416.37 ccw(c4552,2413.84) 4552,2419.01 ; RN1.3@4556.51,2421.64 cw(c4552,2424.18) 4552,2419.01 ; RN1.3@4573,2419.01 4552,2419.01
A3: RN2.1 U3.A3 | length 1846.3
  Top Layer w5: U3.A3@2965.28,1965.54 4200.91,1965.54 4552,2316.62 ; U3.A3@2970.47,1960.34 cw(c2983,1947.81) 2983,1965.54 cw(c2983,1983.26) U3.A3@2970.47,1970.73 ; 4536.33,2300.95 cw(c4561.19,2276.09) RN2.1@4561.19,2311.25 ; 4544.86,2309.49 cw(c4561.19,2293.16) RN2.1@4561.19,2316.25 ; RN2.1@4553.4,2318.02 cw(c4561.19,2310.23) RN2.1@4561.19,2321.25 ; RN2.1@4556.51,2313.99 ccw(c4552,2311.46) 4552,2316.62 ; RN2.1@4556.51,2319.26 cw(c4552,2321.79) 4552,2316.62 ; RN2.1@4573,2316.62 4552,2316.62
A4: RN2.3 U3.A4 | length 1787.3
  Top Layer w5: U3.A4@2965.28,1926.17 4222.53,1926.17 4550,2253.63 ; U3.A4@2970.47,1920.97 cw(c2983,1908.44) 2983,1926.17 cw(c2983,1943.89) U3.A4@2970.47,1931.36 ; RN2.3@4556.99,2250.27 ccw(c4550,2244.67) 4550,2253.63 ; RN2.3@4556.99,2256.99 cw(c4550,2262.59) 4550,2253.63 ; RN2.3@4573,2253.63 4550,2253.63
A5: RN3.1 U3.A5 | length 1818.7
  Top Layer w5: U3.A5@2965.28,1886.8 4286.55,1886.8 4551,2151.25 ; U3.A5@2970.47,1881.6 cw(c2983,1869.07) 2983,1886.8 cw(c2983,1904.52) U3.A5@2970.47,1891.99 ; 4534.62,2134.87 cw(c4561.19,2108.3) RN3.1@4561.19,2145.88 ; 4543.16,2143.41 cw(c4561.19,2125.37) RN3.1@4561.19,2150.88 ; 4551.69,2151.94 cw(c4561.19,2142.45) RN3.1@4561.19,2155.88 ; RN3.1@4556.75,2148.22 ccw(c4551,2144.28) 4551,2151.25 ; RN3.1@4556.75,2154.28 cw(c4551,2158.22) 4551,2151.25 ; RN3.1@4573,2151.25 4551,2151.25
A6: RN3.3 U3.A6 | length 1785.5
  Top Layer w5: U3.A6@2965.28,1847.43 4312.17,1847.43 4553,2088.26 ; U3.A6@2970.47,1842.23 cw(c2983,1829.7) 2983,1847.43 cw(c2983,1865.15) U3.A6@2970.47,1852.62 ; 4538.04,2073.29 cw(c4561.19,2050.14) RN3.3@4561.19,2082.88 ; 4546.57,2081.83 cw(c4561.19,2067.21) RN3.3@4561.19,2087.88 ; RN3.3@4556.26,2086.12 ccw(c4553,2084.71) 4553,2088.26 ; RN3.3@4556.26,2090.4 cw(c4553,2091.81) 4553,2088.26 ; RN3.3@4573,2088.26 4553,2088.26
A7: RN4.1 U3.A7 | length 1759.4
  Top Layer w5: U3.A7@2965.28,1808.06 4375.18,1808.06 4553,1985.88 ; U3.A7@2970.47,1802.86 cw(c2983,1790.33) 2983,1808.06 cw(c2983,1825.78) U3.A7@2970.47,1813.25 ; 4538.04,1970.91 cw(c4561.19,1947.76) RN4.1@4561.19,1980.5 ; 4546.57,1979.45 cw(c4561.19,1964.83) RN4.1@4561.19,1985.5 ; RN4.1@4556.26,1983.74 ccw(c4553,1982.32) 4553,1985.88 ; RN4.1@4556.26,1988.01 cw(c4553,1989.43) 4553,1985.88 ; RN4.1@4573,1985.88 4553,1985.88
A8: RN4.3 U3.A8 | length 1764.8
  Top Layer w5: U3.A8@2965.28,1768.68 4397.8,1768.68 4552,1922.88 ; U3.A8@2970.47,1763.49 cw(c2983,1750.96) 2983,1768.68 cw(c2983,1786.41) U3.A8@2970.47,1773.88 ; 4536.33,1907.21 cw(c4561.19,1882.35) RN4.3@4561.19,1917.51 ; 4544.86,1915.75 cw(c4561.19,1899.42) RN4.3@4561.19,1922.51 ; RN4.3@4553.4,1924.28 cw(c4561.19,1916.49) RN4.3@4561.19,1927.51 ; RN4.3@4556.51,1920.25 ccw(c4552,1917.71) 4552,1922.88 ; RN4.3@4556.51,1925.52 cw(c4552,1928.05) 4552,1922.88 ; RN4.3@4573,1922.88 4552,1922.88
A9: RN5.1 U3.A9 | length 1738.7
  Top Layer w5: U3.A9@2965.28,1729.32 4460.81,1729.32 4552,1820.5 ; U3.A9@2970.47,1724.12 cw(c2983,1711.59) 2983,1729.32 cw(c2983,1747.04) U3.A9@2970.47,1734.51 ; 4536.33,1804.83 cw(c4561.19,1779.97) RN5.1@4561.19,1815.13 ; 4544.86,1813.36 cw(c4561.19,1797.04) RN5.1@4561.19,1820.13 ; RN5.1@4553.4,1821.9 cw(c4561.19,1814.11) RN5.1@4561.19,1825.13 ; RN5.1@4556.51,1817.87 ccw(c4552,1815.33) 4552,1820.5 ; RN5.1@4556.51,1823.13 cw(c4552,1825.67) 4552,1820.5 ; RN5.1@4573,1820.5 4552,1820.5
A10: RN5.3 U3.A10 | length 1683.9
  Top Layer w5: U3.A10@2965.28,1689.94 4478.44,1689.94 4546,1757.51 RN5.3@4573,1757.51 ; U3.A10@2970.47,1684.75 cw(c2983,1672.22) 2983,1689.94 cw(c2983,1707.67) U3.A10@2970.47,1695.14 ; RN5.3@4557.39,1753.71 ccw(c4548.22,1744.53) 4548.22,1757.51 ccw(c4548.22,1770.48) RN5.3@4557.39,1761.31
A11: RN6.1 U3.A11 | length 1670.9
  Top Layer w5: U3.A11@2965.28,1650.57 RN6.1@4573,1650.57 ; U3.A11@2970.47,1645.38 cw(c2983,1632.85) 2983,1650.57 cw(c2983,1668.3) U3.A11@2970.47,1655.77 ; 4537.23,1650.57 ccw(c4537.23,1679.08) RN6.1@4557.39,1658.92 ; 4549.3,1650.57 ccw(c4549.3,1667.01) RN6.1@4560.92,1655.39
A12: RN6.3 U3.A12 | length 1708.8
  Top Layer w5: U3.A12@2965.28,1611.2 4532.93,1611.2 4552,1592.13 ; U3.A12@2970.47,1606.01 cw(c2983,1593.48) 2983,1611.2 cw(c2983,1628.93) U3.A12@2970.47,1616.4 ; 4536.33,1607.8 ccw(c4561.19,1632.66) RN6.3@4561.19,1597.51 ; 4544.86,1599.27 ccw(c4561.19,1615.59) RN6.3@4561.19,1592.51 ; RN6.3@4553.4,1590.73 ccw(c4561.19,1598.52) RN6.3@4561.19,1587.51 ; RN6.3@4556.51,1589.5 ccw(c4552,1586.96) 4552,1592.13 ; RN6.3@4556.51,1594.77 cw(c4552,1597.3) 4552,1592.13 ; RN6.3@4573,1592.13 4552,1592.13
A13: RN7.1 U3.A13 | length 1724.6
  Top Layer w5: U3.A13@2965.28,1571.83 4470.17,1571.83 4552.25,1489.75 ; U3.A13@2970.47,1566.64 cw(c2983,1554.11) 2983,1571.83 cw(c2983,1589.56) U3.A13@2970.47,1577.03 ; 4536.76,1505.24 ccw(c4561.19,1529.68) RN7.1@4561.19,1495.12 ; 4545.29,1496.71 ccw(c4561.19,1512.61) RN7.1@4561.19,1490.12 ; RN7.1@4556.44,1487.23 ccw(c4552.25,1485) 4552.25,1489.75 ; RN7.1@4556.44,1492.27 cw(c4552.25,1494.5) 4552.25,1489.75 ; RN7.1@4573,1489.75 4552.25,1489.75
ASDO: U3.C1 U8.5 | length 1331.8
  Top Layer w5: U3.C1@2883.07,2050.75 ccw(c2879.97,2056.53) 2886.54,2056.53 ; U3.C1@2883.88,2044.28 cw(c2907.06,2044.28) 2890.67,2060.67 ; U3.C1@2886.54,2044.28 2886.54,2056.54 ; U3.C1@2888.88,2044.28 cw(c2924.13,2044.28) 2899.2,2069.2 ; U3.C1@2890,2050.75 cw(c2893.1,2056.53) 2886.54,2056.53 ; U3.C1@2893.88,2044.28 cw(c2941.2,2044.28) 2907.74,2077.74 ; 3678.26,2464.26 cw(c3693.8,2448.72) U8.5@3696.46,2470.53 ; U8.5@3695.85,2465.57 ccw(c3692.22,2435.78) 3671,2457 ; U8.5@3715,2475 3689,2475 3671,2457 ; 2886.54,2056.54 2931,2101 3611,2101 3671,2161 3671,2457
B1: RN1.2 U3.B1 | length 1908.5
  Top Layer w5: U3.B1@2925.91,2044.28 2947.63,2066 4167.5,2066 4552,2450.5 ; U3.B1@2925.91,2051.62 ccw(c2925.91,2069.34) 2938.44,2056.81 ccw(c2950.97,2044.28) U3.B1@2933.25,2044.28 ; 4536.33,2434.83 cw(c4561.19,2409.97) RN1.2@4561.19,2445.13 ; 4544.86,2443.37 cw(c4561.19,2427.04) RN1.2@4561.19,2450.13 ; RN1.2@4553.4,2451.9 cw(c4561.19,2444.11) RN1.2@4561.19,2455.13 ; RN1.2@4556.51,2447.87 ccw(c4552,2445.34) 4552,2450.5 ; RN1.2@4556.51,2453.14 cw(c4552,2455.67) 4552,2450.5 ; RN1.2@4573,2450.5 4552,2450.5
B3: RN1.4 U3.B3 | length 1885.9
  Top Layer w5: U3.B3@2925.91,1965.54 2945.37,1985 4152,1985 4554.51,2387.51 RN1.4@4573,2387.51 ; U3.B3@2925.91,1972.88 ccw(c2925.91,1990.6) 2938.44,1978.07 ccw(c2950.97,1965.54) U3.B3@2933.25,1965.54 ; 4540.62,2373.62 cw(c4561.19,2353.04) RN1.4@4561.19,2382.14 ; 4549.15,2382.15 cw(c4561.19,2370.11) RN1.4@4561.19,2387.14
B4: RN2.2 U3.B4 | length 1873.8
  Top Layer w5: U3.B4@2925.91,1926.17 2944.74,1945 4212.87,1945 4553,2285.13 ; U3.B4@2925.91,1933.51 ccw(c2925.91,1951.23) 2938.44,1938.7 ccw(c2950.97,1926.17) U3.B4@2933.25,1926.17 ; 4538.04,2270.16 cw(c4561.19,2247.01) RN2.2@4561.19,2279.75 ; 4546.57,2278.7 cw(c4561.19,2264.08) RN2.2@4561.19,2284.75 ; RN2.2@4556.26,2282.99 ccw(c4553,2281.58) 4553,2285.13 ; RN2.2@4556.26,2287.27 cw(c4553,2288.68) 4553,2285.13 ; RN2.2@4573,2285.13 4553,2285.13
B5: RN2.4 U3.B5 | length 1864
  Top Layer w5: U3.B5@2925.91,1886.8 2945.11,1906 4236.86,1906 4553,2222.14 ; U3.B5@2925.91,1894.14 ccw(c2925.91,1911.86) 2938.44,1899.33 ccw(c2950.97,1886.8) U3.B5@2933.25,1886.8 ; 4538.04,2207.17 cw(c4561.19,2184.02) RN2.4@4561.19,2216.76 ; 4546.57,2215.71 cw(c4561.19,2201.09) RN2.4@4561.19,2221.76 ; RN2.4@4556.26,2220 ccw(c4553,2218.58) 4553,2222.14 ; RN2.4@4556.26,2224.28 cw(c4553,2225.69) 4553,2222.14 ; RN2.4@4573,2222.14 4553,2222.14
B6: RN3.2 U3.B6 | length 1837.9
  Top Layer w5: U3.B6@2925.91,1847.43 2946.48,1868 4301.25,1868 4553,2119.75 ; U3.B6@2925.91,1854.77 ccw(c2925.91,1872.49) 2938.44,1859.96 ccw(c2950.97,1847.43) U3.B6@2933.25,1847.43 ; 4538.04,2104.79 cw(c4561.19,2081.64) RN3.2@4561.19,2114.38 ; 4546.57,2113.32 cw(c4561.19,2098.71) RN3.2@4561.19,2119.38 ; RN3.2@4556.26,2117.62 ccw(c4553,2116.2) 4553,2119.75 ; RN3.2@4556.26,2121.89 cw(c4553,2123.31) 4553,2119.75 ; RN3.2@4573,2119.75 4553,2119.75
B7: RN3.4 U3.B7 | length 1828.2
  Top Layer w5: U3.B7@2925.91,1808.06 2945.85,1828 4324.24,1828 4553,2056.76 ; U3.B7@2925.91,1815.4 ccw(c2925.91,1833.12) 2938.44,1820.59 ccw(c2950.97,1808.06) U3.B7@2933.25,1808.06 ; 4538.04,2041.8 cw(c4561.19,2018.64) RN3.4@4561.19,2051.39 ; 4546.57,2050.33 cw(c4561.19,2035.71) RN3.4@4561.19,2056.39 ; RN3.4@4556.26,2054.62 ccw(c4553,2053.21) 4553,2056.76 ; RN3.4@4556.26,2058.9 cw(c4553,2060.31) 4553,2056.76 ; RN3.4@4573,2056.76 4553,2056.76
B8: RN4.2 U3.B8 | length 1802.1
  Top Layer w5: U3.B8@2925.91,1768.68 2946.22,1789 4387.62,1789 4553,1954.38 ; U3.B8@2925.91,1776.03 ccw(c2925.91,1793.75) 2938.44,1781.22 ccw(c2950.97,1768.68) U3.B8@2933.25,1768.68 ; 4538.04,1939.41 cw(c4561.19,1916.26) RN4.2@4561.19,1949 ; 4546.57,1947.95 cw(c4561.19,1933.33) RN4.2@4561.19,1954 ; RN4.2@4556.26,1952.24 ccw(c4553,1950.83) 4553,1954.38 ; RN4.2@4556.26,1956.52 cw(c4553,1957.93) 4553,1954.38 ; RN4.2@4573,1954.38 4553,1954.38
B9: RN4.4 U3.B9 | length 1760.9
  Top Layer w5: U3.B9@2925.91,1729.32 2945.59,1749 4408,1749 4550.39,1891.39 ; U3.B9@2925.91,1736.66 ccw(c2925.91,1754.38) 2938.44,1741.85 ccw(c2950.97,1729.32) U3.B9@2933.25,1729.32 ; 4553,1894 4550.39,1891.39 ; RN4.4@4556.9,1888.15 ccw(c4550.39,1883.22) 4550.39,1891.39 ; RN4.4@4556.9,1894.63 cw(c4550.39,1899.56) 4550.39,1891.39 ; RN4.4@4573,1891.39 4550.39,1891.39
B10: RN5.2 U3.B10 | length 1789.6
  Top Layer w5: U3.B10@2925.91,1689.94 2944.96,1709 4471,1709 4551,1789 ; U3.B10@2925.91,1697.29 ccw(c2925.91,1715.01) 2938.44,1702.48 ccw(c2950.97,1689.94) U3.B10@2933.25,1689.94 ; 4534.62,1772.63 cw(c4561.19,1746.06) RN5.2@4561.19,1783.63 ; 4543.16,1781.16 cw(c4561.19,1763.13) RN5.2@4561.19,1788.63 ; 4551.69,1789.7 cw(c4561.19,1780.2) RN5.2@4561.19,1793.63 ; RN5.2@4556.75,1785.97 ccw(c4551,1782.03) 4551,1789 ; RN5.2@4556.75,1792.04 cw(c4551,1795.98) 4551,1789 ; RN5.2@4573,1789 4551,1789
B11: RN5.4 U3.B11 | length 1726.6
  Top Layer w5: U3.B11@2925.91,1650.57 2946.33,1671 4487.99,1671 4543,1726.01 RN5.4@4573,1726.01 ; U3.B11@2925.91,1657.92 ccw(c2925.91,1675.64) 2938.44,1663.11 ccw(c2950.97,1650.57) U3.B11@2933.25,1650.57 ; RN5.4@4557.39,1722.21 ccw(c4548.22,1713.04) 4548.22,1726.01 ccw(c4548.22,1738.99) RN5.4@4557.39,1729.81
B12: RN6.2 U3.B12 | length 1717.1
  Top Layer w5: U3.B12@2925.91,1611.2 2944.7,1630 4546.63,1630 ; U3.B12@2925.91,1618.55 ccw(c2925.91,1636.27) 2938.44,1623.74 ccw(c2950.97,1611.2) U3.B12@2933.25,1611.2 ; 4551.32,1625.31 ccw(c4557.06,1631.06) RN6.2@4561.01,1623.96 ; RN6.2@4556.26,1621.49 ccw(c4553,1620.08) 4553,1623.63 ; RN6.2@4556.26,1625.77 cw(c4553,1627.18) 4553,1623.63 ; RN6.2@4558.58,1628.33 cw(c4553.71,1637.08) 4546.63,1630 ; RN6.2@4573,1623.63 4553,1623.63 ; 4546.63,1630 4553,1623.63
B13: RN6.4 U3.B13 | length 1726
  Top Layer w5: U3.B13@2925.91,1571.83 2945.11,1591.04 2945.11,1592 4525,1592 4556.36,1560.64 RN6.4@4573,1560.64 ; U3.B13@2925.91,1579.18 ccw(c2925.91,1596.9) 2938.44,1584.37 ccw(c2950.97,1571.83) U3.B13@2933.25,1571.83 ; 4543.78,1573.22 ccw(c4561.19,1590.63) RN6.4@4561.19,1566.01 ; 4552.31,1564.69 ccw(c4561.19,1573.56) RN6.4@4561.19,1561.01
BLUE: C40.1 J4.3 RN31.2 RN31.3 RN31.4 RN32.4 RN32.8 RN33.8 | length 2006.7
  Top Layer w12: J4.3@4135,3004 cw(c4135,2936.4) 4182.8,2984.2 cw(c4230.6,3032) J4.3@4163,3032 ; J4.3@4135,3016 cw(c4135,2977.37) 4162.31,3004.69 cw(c4189.63,3032) J4.3@4151,3032 ; J4.3@4135,3032 4235,2932 4596,2932 4656,2872 4656,2728 4609,2681 4609,2593.85 ; RN31.4@4173.51,2643 4173.51,2669.51 4186,2682 4452,2682 ; RN31.3@4205.01,2643 4205.01,2678.99 ; RN31.2@4236.5,2643 4236.5,2680.5 ; RN32.4@4331.51,2643 4331.51,2678.51 ; RN32.8@4426,2569.85 4426,2577 4452,2603 4452,2682 ; RN32.8@4426,2583.54 ccw(c4426,2599.31) 4437.16,2588.16 ; RN33.8@4585.85,2572.54 ccw(c4585.91,2576.82) RN33.8@4588.94,2573.79 ; RN33.8@4586,2570.85 4609,2593.85 ; RN33.8@4586.03,2584.53 ccw(c4586.5,2616.34) 4609,2593.85 ; 4608,2682 4452,2682
  Bottom Layer w20: J4.3@4118.03,3015.03 cw(c4077.06,2974.06) 4135,2974.06 cw(c4192.94,2974.06) J4.3@4151.97,3015.03 ; C40.1@4135,2940 J4.3@4135,3032
BUZZER: CB1.1 U3.C11 | length 920.6
  Top Layer w10: U3.C11@2886.54,1645.73 cw(c2886.54,1634.04) 2894.8,1642.31 cw(c2903.07,1650.57) U3.C11@2891.38,1650.57 ; U3.C11@2886.54,1650.57 v1(2906.22,1630.89) ; v1@2901.22,1630.89 ccw(c2889.15,1630.89) 2897.69,1639.42 ccw(c2906.22,1647.96) v1@2906.22,1635.89
  Mid-Layer 1 w5: v1(2906.22,1630.89) 3150.11,1630.89 CB1.1@3305,1476 ; v1@2911.52,1625.59 cw(c2924.33,1612.78) 2924.33,1630.89 cw(c2924.33,1649) v1@2911.52,1636.19 ; CB1.1@3273.5,1476 ccw(c3197.45,1476) 3251.23,1529.77 ccw(c3305,1583.55) CB1.1@3305,1507.5 ; CB1.1@3278.5,1476 ccw(c3214.52,1476) 3259.76,1521.24 ccw(c3305,1566.48) CB1.1@3305,1502.5 ; CB1.1@3283.5,1476 ccw(c3231.59,1476) 3268.3,1512.7 ccw(c3305,1549.41) CB1.1@3305,1497.5 ; CB1.1@3288.5,1476 ccw(c3248.67,1476) 3276.83,1504.17 ccw(c3305,1532.33) CB1.1@3305,1492.5
C2: RN1.1 U3.C2 | length 1994
  Top Layer w5: U3.C2@2886.54,2004.91 2905,2023.37 2905,2052 2938,2085 4155,2085 4552,2482 ; U3.C2@2886.54,2012.25 ccw(c2886.54,2029.97) 2899.07,2017.44 ccw(c2911.6,2004.91) U3.C2@2893.88,2004.91 ; 4536.33,2466.33 cw(c4561.19,2441.47) RN1.1@4561.19,2476.63 ; 4544.86,2474.86 cw(c4561.19,2458.54) RN1.1@4561.19,2481.63 ; RN1.1@4553.4,2483.4 cw(c4561.19,2475.61) RN1.1@4561.19,2486.63 ; RN1.1@4556.51,2479.37 ccw(c4552,2476.83) 4552,2482 ; RN1.1@4556.51,2484.63 cw(c4552,2487.17) 4552,2482 ; RN1.1@4573,2482 4552,2482
C6: RN7.4 U3.C6 | length 2069.8
  Top Layer w5: v1(4535.26,1395.26) RN7.4@4573,1395.26 ; v1@4540.57,1389.96 cw(c4553.37,1377.16) 4553.37,1395.26 cw(c4553.37,1413.37) v1@4540.57,1400.57 ; RN7.4@4557.39,1391.46 ccw(c4548.22,1382.29) 4548.22,1395.26 ccw(c4548.22,1408.24) RN7.4@4557.39,1399.06
  Top Layer w10: U3.C6@2886.54,1847.43 v1(2906.22,1867.11) ; U3.C6@2886.54,1852.27 ccw(c2886.54,1863.96) 2894.8,1855.69 ccw(c2903.07,1847.43) U3.C6@2891.38,1847.43 ; v1@2901.22,1867.11 cw(c2889.15,1867.11) 2897.69,1858.58 cw(c2906.22,1850.04) v1@2906.22,1862.11
  Mid-Layer 1 w5: v1(2906.22,1867.11) 3746.89,1867.11 4263,1351 4491,1351 v1(4535.26,1395.26) ; v1@2911.52,1861.81 cw(c2924.33,1849) 2924.33,1867.11 cw(c2924.33,1885.22) v1@2911.52,1872.41 ; v1@4527.76,1395.26 cw(c4509.66,1395.26) 4522.46,1382.46 cw(c4535.26,1369.66) v1@4535.26,1387.76
C8: RN8.3 U3.C8 | length 2055.7
  Top Layer w5: v1(4536,1261) RN8.3@4572.62,1261 ; v1@4541.3,1255.7 cw(c4554.11,1242.89) 4554.11,1261 cw(c4554.11,1279.11) v1@4541.3,1266.3 ; 4547.29,1261 ccw(c4547.29,1275.28) RN8.3@4557.39,1265.18 ; 4549.14,1261 cw(c4549.14,1249.33) RN8.3@4557.39,1257.58
  Top Layer w10: U3.C8@2886.54,1768.68 v1(2906.22,1788.37) ; U3.C8@2886.54,1773.53 ccw(c2886.54,1785.22) 2894.8,1776.95 ccw(c2903.07,1768.68) U3.C8@2891.38,1768.68 ; v1@2901.22,1788.37 cw(c2889.15,1788.37) 2897.69,1779.84 cw(c2906.22,1771.3) v1@2906.22,1783.37
  Mid-Layer 1 w5: v1(2906.22,1788.37) 3564.63,1788.37 4092,1261 v1(4536,1261) ; v1@2911.52,1783.07 cw(c2924.33,1770.26) 2924.33,1788.37 cw(c2924.33,1806.48) v1@2911.52,1793.67 ; v1@4530.7,1255.7 ccw(c4517.89,1242.89) 4517.89,1261 ccw(c4517.89,1279.11) v1@4530.7,1266.3
CLK: R3.1 U3.E1 | length 294.3
  Top Layer w5: U3.E1@2802.6,2049.47 ccw(c2790.07,2062) 2807.8,2062 ccw(c2825.52,2062) U3.E1@2812.99,2049.47 ; U3.E1@2807.8,2044.28 2807.8,2088.8 2905,2186 R3.1@2906,2186 ; 2881.25,2162.25 cw(c2906,2137.49) R3.1@2906,2172.5 ; 2883.66,2164.66 ccw(c2862.32,2186) R3.1@2892.5,2186 ; 2889.78,2170.78 cw(c2906,2154.57) R3.1@2906,2177.5 ; R3.1@2892.2,2173.2 ccw(c2879.39,2186) R3.1@2897.5,2186
CONF_DONE: R11.2 R13.1 U3.H14 | length 1379.2
  Top Layer w5: v1(3322,1272) R11.2@3411,1272 R13.1@3471,1272 ; v1@3327.3,1266.7 cw(c3340.11,1253.89) 3340.11,1272 cw(c3340.11,1290.11) v1@3327.3,1277.3 ; R11.2@3401.45,1262.45 ccw(c3378.41,1239.41) 3378.41,1272 ccw(c3378.41,1304.59) R11.2@3401.45,1281.55 ; R11.2@3404.99,1265.99 ccw(c3390.48,1251.48) 3390.48,1272 ccw(c3390.48,1292.52) R11.2@3404.99,1278.01 ; R11.2@3417.01,1265.99 cw(c3431.52,1251.48) 3431.52,1272 cw(c3431.52,1292.52) R11.2@3417.01,1278.01 ; R11.2@3420.55,1262.45 cw(c3443.59,1239.41) 3443.59,1272 cw(c3443.59,1304.59) R11.2@3420.55,1281.55 ; R13.1@3461.45,1262.45 ccw(c3438.41,1239.41) 3438.41,1272 ccw(c3438.41,1304.59) R13.1@3461.45,1281.55 ; R13.1@3464.99,1265.99 ccw(c3450.48,1251.48) 3450.48,1272 ccw(c3450.48,1292.52) R13.1@3464.99,1278.01
  Top Layer w10: U3.H14@2689.68,1527.62 cw(c2689.68,1515.93) 2697.95,1524.2 cw(c2706.22,1532.46) U3.H14@2694.53,1532.46 ; U3.H14@2689.68,1532.46 v1(2709.37,1512.78) ; v1@2704.37,1512.78 ccw(c2692.3,1512.78) 2700.84,1521.31 ccw(c2709.37,1529.85) v1@2709.37,1517.78
  Mid-Layer 1 w5: v1@2709.37,1505.28 cw(c2709.37,1497.19) 2715.09,1502.91 ; v1(2709.37,1512.78) 2709.37,1508.63 2735,1483 2735,1393 v1(2857,1271) ; v1@2711.87,1512.78 ccw(c2727.92,1512.78) 2716.57,1501.43 ; v1@2716.87,1512.78 ccw(c2745,1512.78) 2725.11,1492.89 ; v1@2849.5,1271 ccw(c2831.39,1271) 2844.2,1283.8 ccw(c2857,1296.61) v1@2857,1278.5
  Bottom Layer w5: v1@2862.3,1265.7 cw(c2877.52,1250.48) 2877.52,1272 ; v1@2862.3,1276.3 ccw(c2872.69,1286.69) 2872.69,1272 ; v1@2865,1272 v1(3322,1272) ; v1@3316.7,1266.7 ccw(c3303.89,1253.89) 3303.89,1272 ccw(c3303.89,1290.11) v1@3316.7,1277.3
D1V2: C5.1 C6.1 C7.1 C8.1 C9.1 C48.1 EC4.1 P4.2 U3.D13 U3.G6 U3.G7 U3.G8 U3.G9 U3.G10 U3.H6 U3.H11 U3.K7 U3.N4 U5.2 U5.4 | length 1544.9
  Top Layer w19.68: v1(2473.15,1945.85) U3.N4@2492.83,1926.17 ; v1(2591.26,1827.74) U3.K7@2610.94,1808.06 ; U3.H11@2689.68,1650.57 v1(2709.37,1630.89) ; U3.H6@2689.68,1847.43 v1(2709.37,1867.11) ; U3.G10@2729.06,1689.94 v1(2748.74,1670.26) ; U3.G9@2729.06,1729.32 v1(2748.74,1709.63) ; U3.G8@2729.06,1768.68 v1(2748.74,1788.37) ; U3.G7@2729.06,1808.06 v1(2748.74,1827.74) ; U3.G6@2729.06,1847.43 v1(2748.74,1867.11) ; U3.D13@2847.17,1571.83 v1(2866.85,1552.15)
  Top Layer w20: EC4.1@2352,2662.94 cw(c2352,2496.23) 2469.88,2614.12 ; EC4.1@2352,2682.94 cw(c2352,2564.52) 2435.74,2648.26 ; EC4.1@2352,2702.94 cw(c2352,2632.8) 2401.6,2682.4 ; EC4.1@2352,2712 2372,2712 P4.2@2564,2520 ; P4.2@2544.47,2520 ccw(c2497.33,2520) 2530.66,2553.34 ccw(c2564,2586.67) P4.2@2564,2539.53
  Bottom Layer w8: C6.1@2581.5,1749 ccw(c2560.98,1749) 2575.49,1763.51 ccw(c2590,1778.02) C6.1@2590,1757.5 ; v1@2585.26,1827.74 cw(c2570.77,1827.74) 2581.02,1817.5 cw(c2591.26,1807.26) v1@2591.26,1821.74 ; C6.1@2590,1749 2571,1768 2571,1807.48 v1(2591.26,1827.74) ; C5.1@2657.41,1618.52 cw(c2627.27,1588.38) 2669.89,1588.38 cw(c2712.51,1588.38) C5.1@2682.37,1618.52 ; C5.1@2663.06,1624.17 cw(c2646.58,1607.69) 2669.89,1607.69 cw(c2693.2,1607.69) C5.1@2676.72,1624.17 ; C8.1@2664.99,1587.01 ccw(c2653.16,1598.84) 2669.89,1598.84 ; C8.1@2669.89,1585.11 C5.1@2669.89,1631 v1@2709.26,1631 ; 2669.89,1604.2 ccw(c2694.2,1604.2) C8.1@2677.01,1587.01 ; C9.1@2672,1870 v1@2706.48,1870 ; C9.1@2678.01,1863.99 cw(c2692.52,1849.48) 2692.52,1870 cw(c2692.52,1890.52) C9.1@2678.01,1876.01 ; 2687.91,1870 cw(c2687.91,1845.65) v1@2705.13,1862.87 ; C5.1@2689.39,1620.76 cw(c2709.26,1606.6) v1@2709.26,1631 ; C5.1@2689.39,1641.24 ccw(c2709.26,1655.4) v1@2709.26,1631 ; C5.1@2694.62,1631 cw(c2694.62,1616.14) v1@2705.13,1626.65 ; C5.1@2695.15,1631 ccw(c2695.15,1645.11) v1@2705.13,1635.13 ; v1@2703.91,1628.4 ccw(c2694.15,1623.94) 2696.93,1634.3 ccw(c2699.78,1644.94) v1@2705.99,1635.84 ; v1@2703.92,1633.39 cw(c2694.65,1637.64) 2697.29,1627.79 cw(c2699.81,1618.38) v1@2705.73,1626.12
  Bottom Layer w20: 2196,2741 C48.1@2196,2800
  other v1: 2249,2657 2287,2657 2287,2688 2248,2690 2286,2726 2248,2727 2286,2760 2249,2761